# Altium PCB RailGun and Grabber PCB.PcbDoc (part 2 of 2)
Units mm, origin at the board's own origin, x right, y up, seen from the top; angles counter-clockwise.
Board outline 60 x 60 mm, 2 copper layers (Top Layer, Bottom Layer); 106 components, 58 nets, 345 pads, 4 vias.
Unrouted connection lines stored in the file: 213.
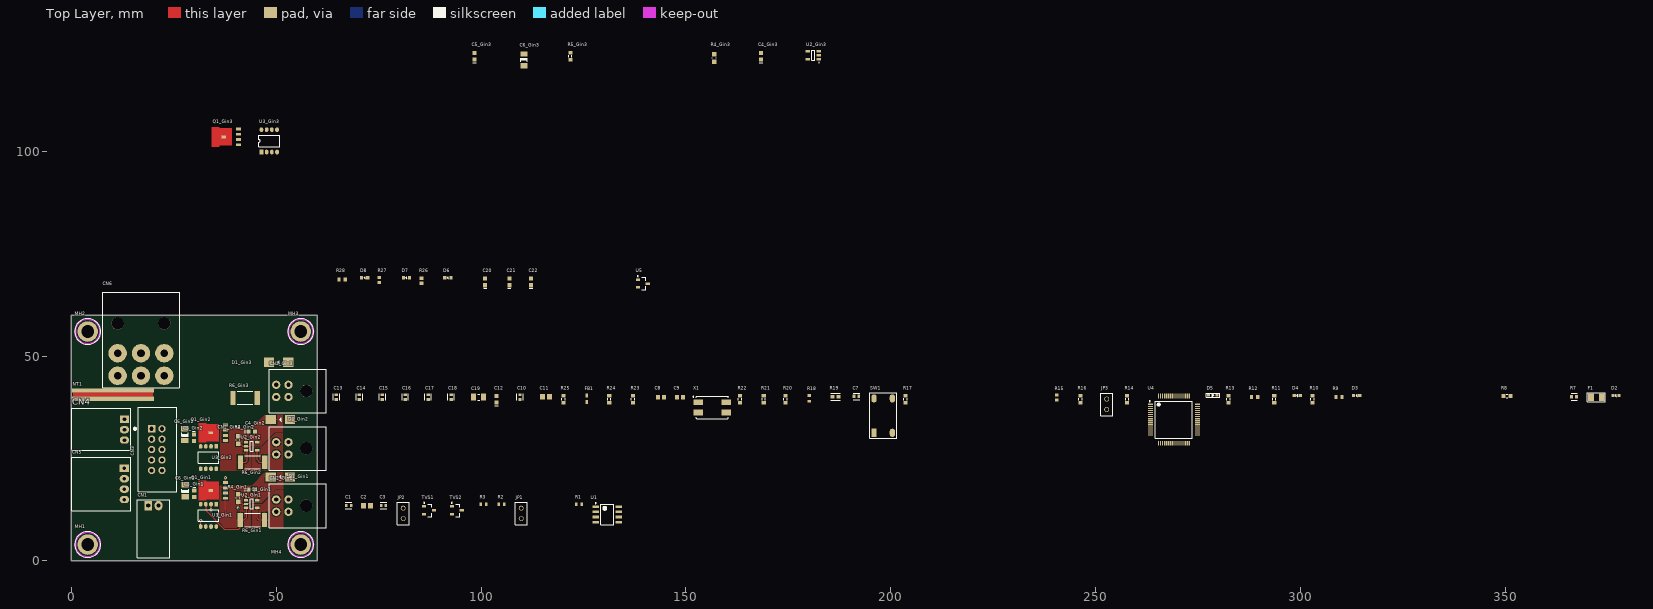
[diagram p0: Top Layer view]

## Polygon pours and split planes (outlines as drawn) (continued)
"Current Shunt In_Gin1" on Top Layer "CURRENT_SHUNT_IN_GIN1_L01_P011" (solid, remove dead copper, pour order 11): 44.1,8 44.1,13.9 46.6,13.9 49.9,17.2 51.7,17.2 51.7,21.7 47.3,21.7 44,18.4 36.2,18.4 36.2,8
"Current Shunt Out_Gin1" on Top Layer "CURRENT_SHUNT_OUT_GIN1_L01_P009" (solid, remove dead copper, pour order 9): 44.1,8 51.6,8 51.7,8.1 51.7,17.2 49.9,17.2 46.6,13.9 44.1,13.9
no net on Top Layer "NONET_L01_P007" (solid, pour order 7): 51.7,7.9
no net on Top Layer "NONET_L01_P006" (solid, pour order 6): 36.5,22.2
no net on Top Layer "NONET_L01_P005" (solid, pour order 5): 35.8,23.2
no net on Top Layer "NONET_L01_P002" (solid, pour order 2): 0,59.9
no net on Top Layer "NONET_L01_P001" (solid, pour order 1): 0,59.9
no net on Bottom Layer "NONET_L02_P000" (solid, pour order 0): 44.5,18.85

## Text inside footprints (layer, text, board x,y; h text height)
FB1: Mechanical 6 "Land Pattern Adapted for Flow Soldering" at 125.2,38.575 h0.05 r90